# EAGLE board shield (EAGLE 6.5.0)
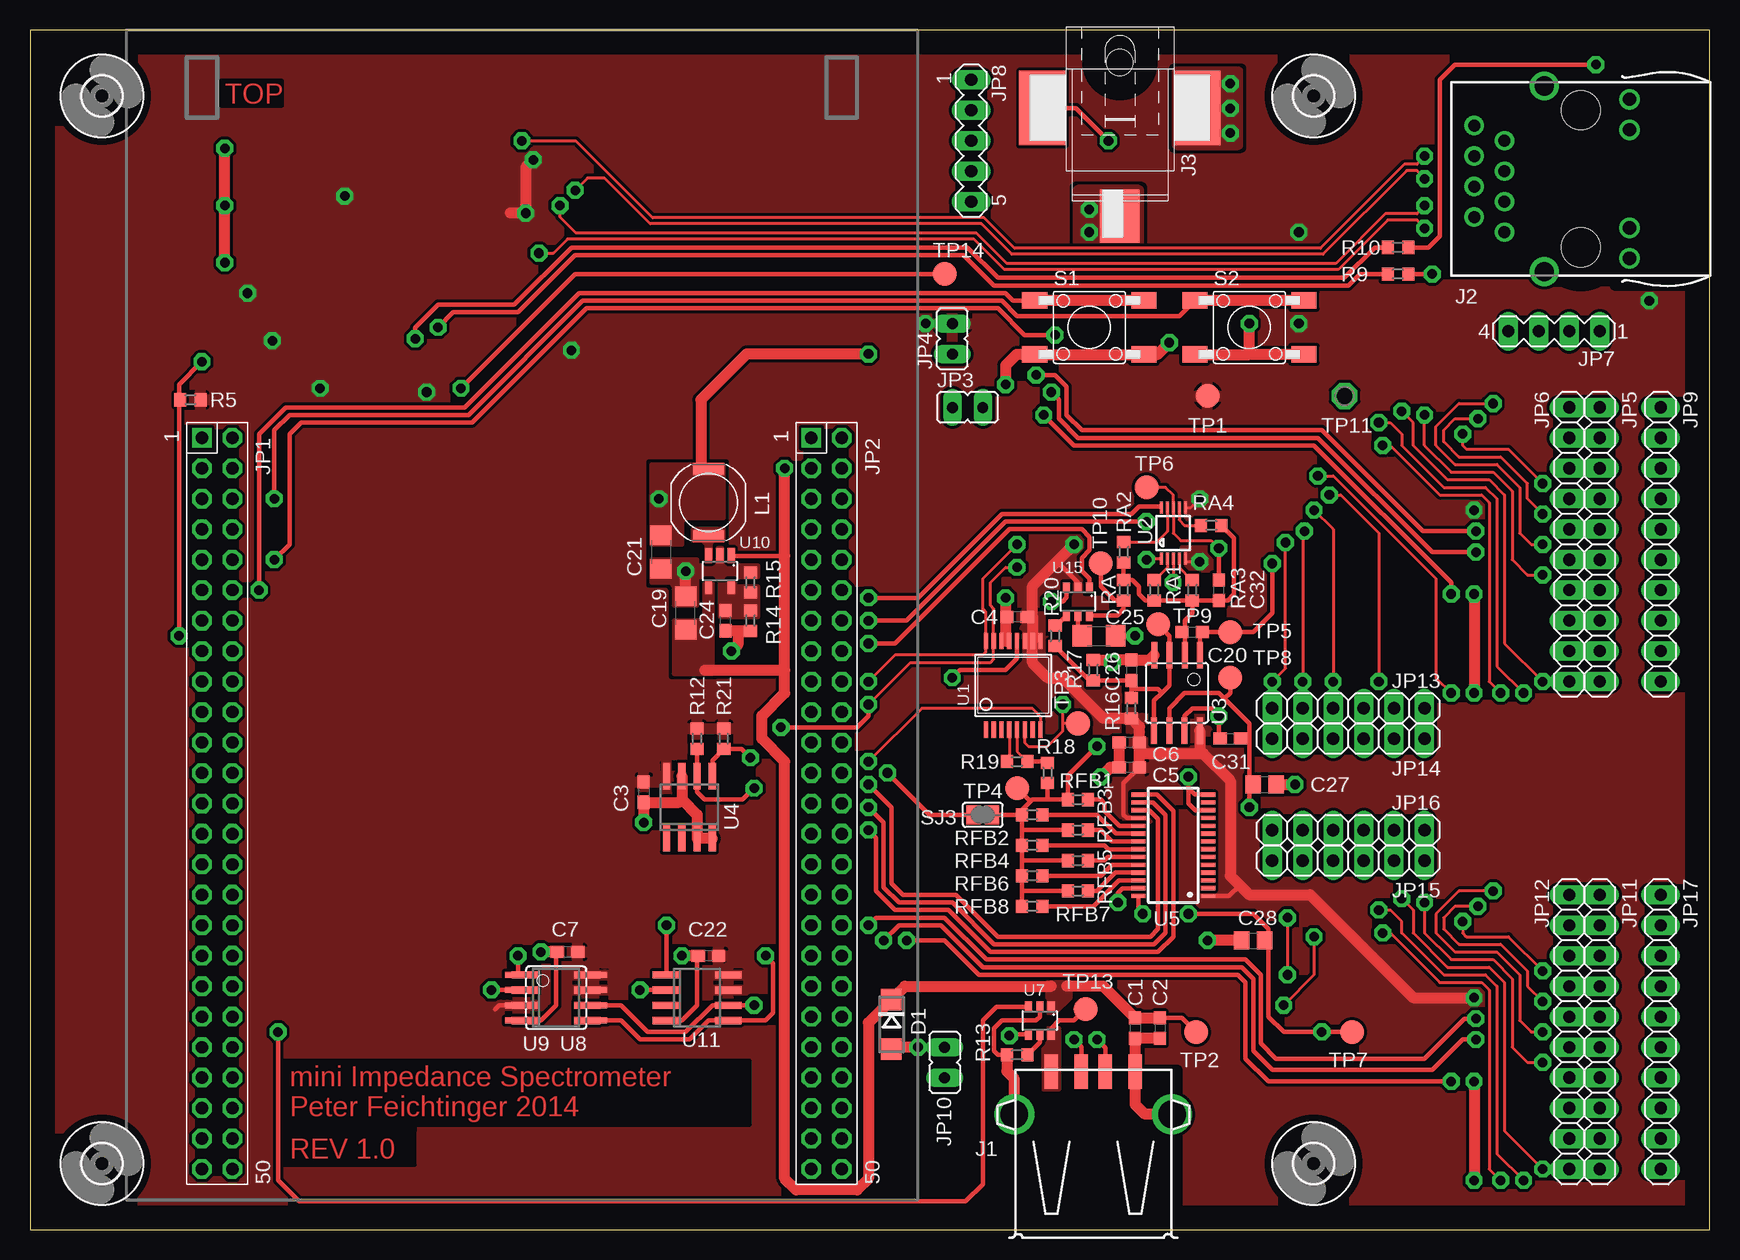
[diagram p0: board, top side]
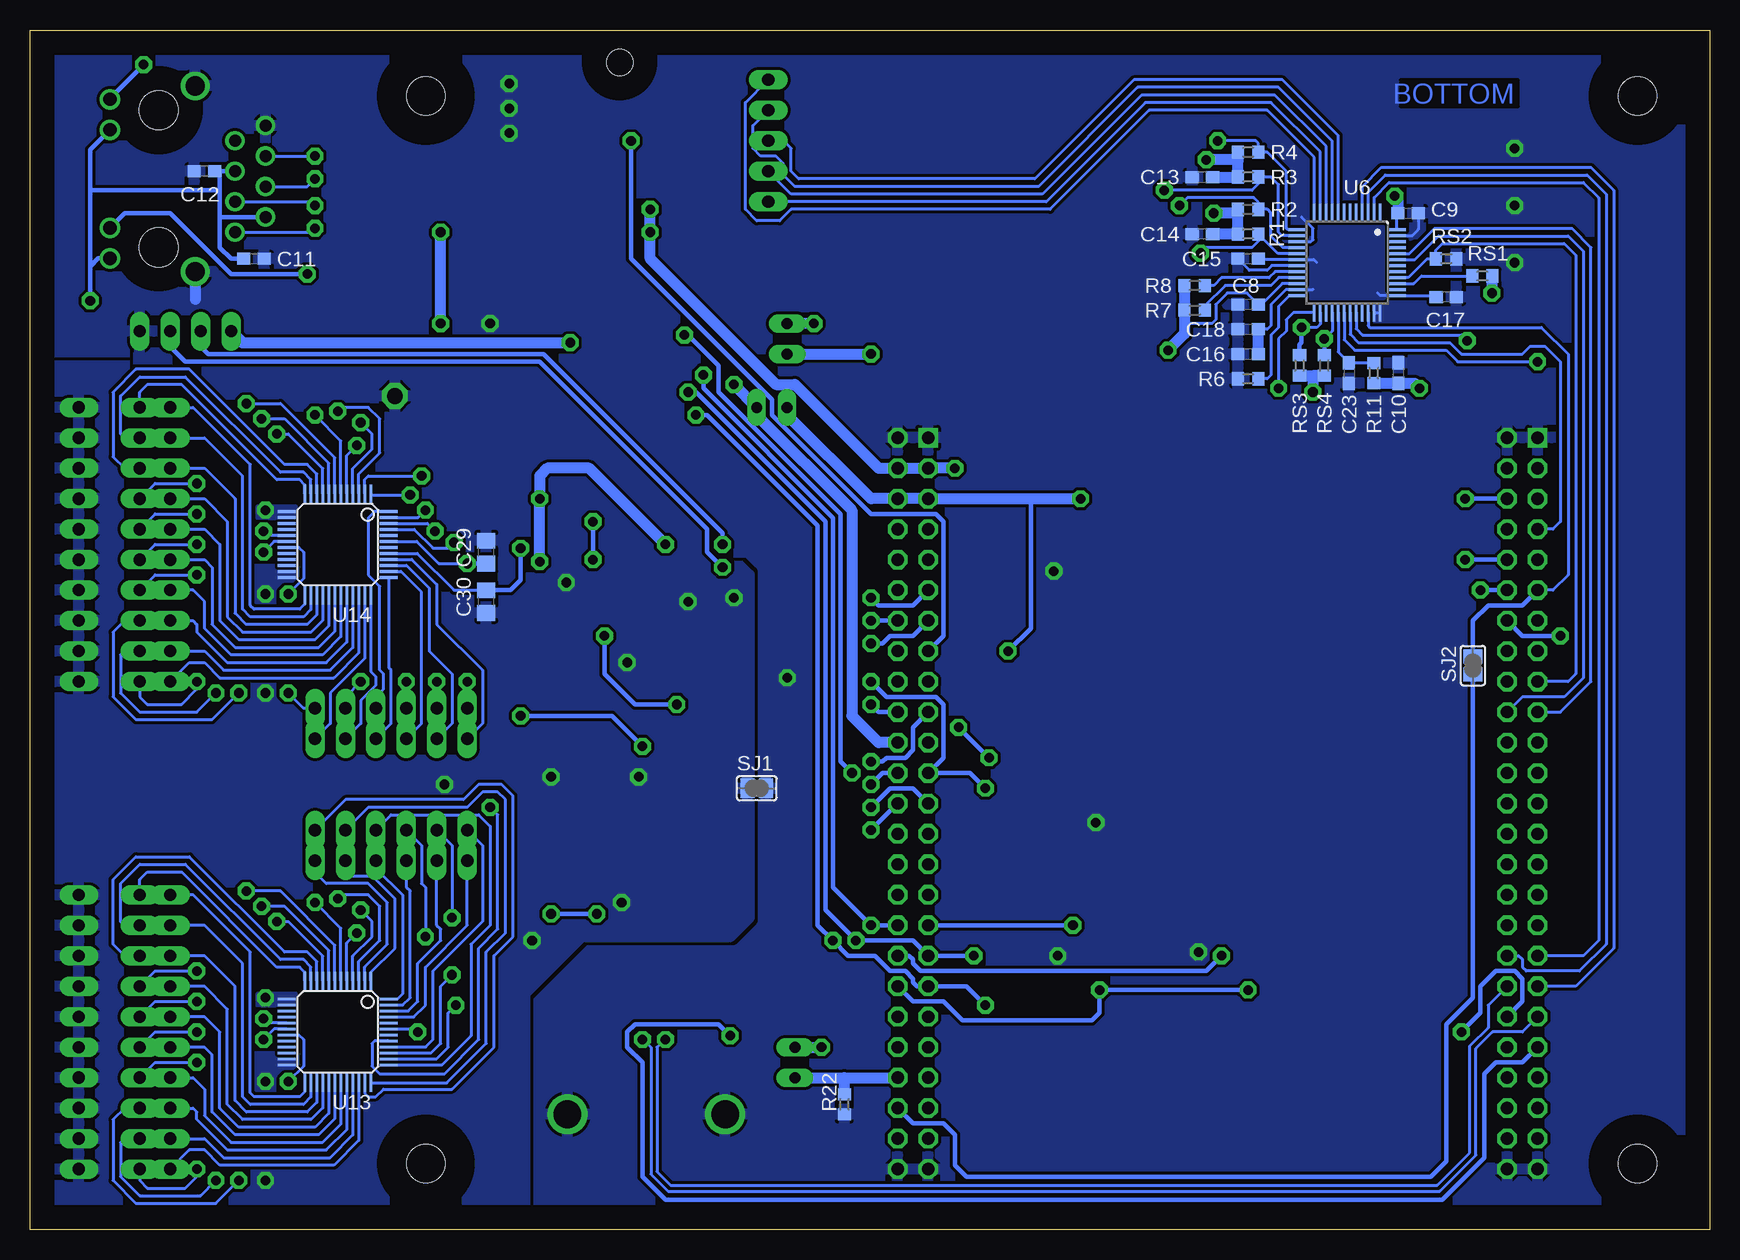
[diagram p1: board, bottom side, seen from below]

Size 140 x 100 mm. Coordinates in mm from the lower left corner, seen from the top.
Outline: 0,0 140,0 140,100 0,100 0,0
Copper layers (1*16): Top 0.035mm / dielectric 1.5mm / Bottom 0.035mm
Design rules "ime": minimum track width 10mil, minimum drill 0.8mm, track to track 10mil, track to pad 10mil, pad to pad 10mil, via to via 10mil, smd to smd 4mil, copper to edge 80mil, drill to drill 8mil, minimum pad ring 12mil, minimum via ring 12mil, stop-mask expansion 4mil, vias tented up to drill 0mil, thermal gap 10mil
Net classes: 1 supply: width 0.914 mm
tRestrict: area 118.5,78.7 to 139.7,96.5; area 81.6,-0.4 to 95.6,13.3; 12 lines
bRestrict: 4 lines

## Footprints (pad centres in the part's own frame; a part is rotated, then mirrored left to right if it is on the bottom)
C0603 = smd 1.1 x 1: 1 -0.85,0; 2 0.85,0
C3216 = smd 1.6 x 1.8: 1 -1.4,0; 2 1.4,0
C1206 = smd 1.6 x 1.8: 1 -1.4,0; 2 1.4,0
C0805 = smd 1.3 x 1.5: 1 -0.95,0; 2 0.95,0
DO214AC = smd 1.8 x 1.7: A 2.05,0; C -2.05,0
USB-2410-06 = smd 1.12 x 2.88: 1 -3.5,13.86; 2 -1,13.86; 3 1,13.86; 4 3.5,13.86 | drill 2.3: S1 -6.57,10.28; S2 6.57,10.28
SI-60062-F = drill 1: 1 -4.445,6.35; 2 -3.175,8.89; 3 -1.905,6.35; 4 -0.635,8.89; 5 0.635,6.35; 6 1.905,8.89; 7 3.175,6.35; 8 4.445,8.89 | drill 1.1: AG 4.089,-4.064; AY -6.629,-4.064; CG 6.629,-4.064; CY -4.089,-4.064 | drill 1.6 pad 2.2: S1 -7.747,3.048; S2 7.747,3.048 | hole 3.251: -5.715,0; 5.715,0
JACK-SMD2.5 = smd 4.4 x 3.3: 1 15.8,0 | smd 6.2 x 3.9: 2 6.8,6.45; 3 6.8,-6.45 | hole 2.2: 3,0
2X25-F = drill 1.016 square: 1 -30.48,-1.27 | drill 1.016 octagon: 2 -30.48,1.27; 3 -27.94,-1.27; 4 -27.94,1.27; 5 -25.4,-1.27; 6 -25.4,1.27; 7 -22.86,-1.27; 8 -22.86,1.27; 9 -20.32,-1.27; 10 -20.32,1.27; 11 -17.78,-1.27; 12 -17.78,1.27; 13 -15.24,-1.27; 14 -15.24,1.27; 15 -12.7,-1.27; 16 -12.7,1.27; 17 -10.16,-1.27; 18 -10.16,1.27; 19 -7.62,-1.27; 20 -7.62,1.27; 21 -5.08,-1.27; 22 -5.08,1.27; 23 -2.54,-1.27; 24 -2.54,1.27; 25 0,-1.27; 26 0,1.27; 27 2.54,-1.27; 28 2.54,1.27; 29 5.08,-1.27; 30 5.08,1.27; 31 7.62,-1.27; 32 7.62,1.27; 33 10.16,-1.27; 34 10.16,1.27; 35 12.7,-1.27; 36 12.7,1.27; 37 15.24,-1.27; 38 15.24,1.27; 39 17.78,-1.27; 40 17.78,1.27; 41 20.32,-1.27; 42 20.32,1.27; 43 22.86,-1.27; 44 22.86,1.27; 45 25.4,-1.27; 46 25.4,1.27; 47 27.94,-1.27; 48 27.94,1.27; 49 30.48,-1.27; 50 30.48,1.27
JP1 = drill 0.914 long: 1 0,-1.27; 2 0,1.27
1X10 = drill 1.016 long: 1 -11.43,0; 2 -8.89,0; 3 -6.35,0; 4 -3.81,0; 5 -1.27,0; 6 1.27,0; 7 3.81,0; 8 6.35,0; 9 8.89,0; 10 11.43,0
MA04-1 = drill 1.016 long: 1 -3.81,0; 2 -1.27,0; 3 1.27,0; 4 3.81,0
MA05-1 = drill 1.016 long: 1 -5.08,0; 2 -2.54,0; 3 0,0; 4 2.54,0; 5 5.08,0
1X06 = drill 1.016 long: 1 -6.35,0; 2 -3.81,0; 3 -1.27,0; 4 1.27,0; 5 3.81,0; 6 6.35,0
D63CB = smd 1 x 2.6: 1 -2.8,0; 2 2.8,0
R0603 = smd 1 x 1.1: 1 -0.85,0; 2 0.85,0
FSM = smd 1.4 x 2.1: 1 2.25,4.55; 2 2.25,-4.55; 3 -2.25,-4.55; 4 -2.25,4.55
SJ = smd 1.168 x 1.6: 1 -0.762,0; 2 0.762,0
TP20R = smd 2 x 2: TP 0,0
P1-13 = drill 1.321 pad 2.159 octagon: TP 0,0
SSOP16 = smd 0.35 x 1.35: 1 -2.275,-3.7; 2 -1.625,-3.7; 3 -0.975,-3.7; 4 -0.325,-3.7; 5 0.325,-3.7; 6 0.975,-3.7; 7 1.625,-3.7; 8 2.275,-3.7; 9 2.275,3.7; 10 1.625,3.7; 11 0.975,3.7; 12 0.325,3.7; 13 -0.325,3.7; 14 -0.975,3.7; 15 -1.625,3.7; 16 -2.275,3.7
MSOP10 = smd 0.25 x 1: 1 -1,-2.113; 2 -0.5,-2.113; 3 0,-2.113; 4 0.5,-2.113; 5 1,-2.113; 6 1,2.113; 7 0.5,2.113; 8 0,2.113; 9 -0.5,2.113; 10 -1,2.113
SOIC8 = smd 0.5 x 2.2: 1 -1.905,-3.154; 2 -0.645,-3.154; 3 0.625,-3.154; 4 1.895,-3.154; 5 1.905,3.154; 6 0.635,3.154; 7 -0.635,3.154; 8 -1.905,3.154
SO8 = smd 0.6 x 2.2: 1 -1.905,-2.6; 2 -0.635,-2.6; 3 0.635,-2.6; 4 1.905,-2.6; 5 1.905,2.6; 6 0.635,2.6; 7 -0.635,2.6; 8 -1.905,2.6
TSSOP28 = smd 0.35 x 1.2: 1 -4.225,-2.9; 2 -3.575,-2.9; 3 -2.925,-2.9; 4 -2.275,-2.9; 5 -1.625,-2.9; 6 -0.975,-2.9; 7 -0.325,-2.9; 8 0.325,-2.9; 9 0.975,-2.9; 10 1.625,-2.9; 11 2.275,-2.9; 12 2.925,-2.9; 13 3.575,-2.9; 14 4.225,-2.9; 15 4.225,2.9; 16 3.575,2.9; 17 2.925,2.9; 18 2.275,2.9; 19 1.625,2.9; 20 0.975,2.9; 21 0.325,2.9; 22 -0.325,2.9; 23 -0.975,2.9; 24 -1.625,2.9; 25 -2.275,2.9; 26 -2.925,2.9; 27 -3.575,2.9; 28 -4.225,2.9
LQFP48 = smd 1.5 x 0.22: 1 -4.15,2.75; 2 -4.15,2.25; 3 -4.15,1.75; 4 -4.15,1.25; 5 -4.15,0.75; 6 -4.15,0.25; 7 -4.15,-0.25; 8 -4.15,-0.75; 9 -4.15,-1.25; 10 -4.15,-1.75; 11 -4.15,-2.25; 12 -4.15,-2.75; 25 4.15,-2.75; 26 4.15,-2.25; 27 4.15,-1.75; 28 4.15,-1.25; 29 4.15,-0.75; 30 4.15,-0.25; 31 4.15,0.25; 32 4.15,0.75; 33 4.15,1.25; 34 4.15,1.75; 35 4.15,2.25; 36 4.15,2.75 | smd 0.22 x 1.5: 13 -2.75,-4.15; 14 -2.25,-4.15; 15 -1.75,-4.15; 16 -1.25,-4.15; 17 -0.75,-4.15; 18 -0.25,-4.15; 19 0.25,-4.15; 20 0.75,-4.15; 21 1.25,-4.15; 22 1.75,-4.15; 23 2.25,-4.15; 24 2.75,-4.15; 37 2.75,4.15; 38 2.25,4.15; 39 1.75,4.15; 40 1.25,4.15; 41 0.75,4.15; 42 0.25,4.15; 43 -0.25,4.15; 44 -0.75,4.15; 45 -1.25,4.15; 46 -1.75,4.15; 47 -2.25,4.15; 48 -2.75,4.15
SOT23-6 = smd 0.6 x 0.9: 1 -0.95,-1.15; 2 0,-1.15; 3 0.95,-1.15; 4 0.95,1.15; 5 0,1.15; 6 -0.95,1.15
TSOT23-5 = smd 0.62 x 1.22: 1 -0.95,-1.3; 2 0,-1.3; 3 0.95,-1.3; 4 0.95,1.3; 5 -0.95,1.3
TQFP48 = smd 0.22 x 1.5: 1 -2.75,-4.25; 2 -2.25,-4.25; 3 -1.75,-4.25; 4 -1.25,-4.25; 5 -0.75,-4.25; 6 -0.25,-4.25; 7 0.25,-4.25; 8 0.75,-4.25; 9 1.25,-4.25; 10 1.75,-4.25; 11 2.25,-4.25; 12 2.75,-4.25; 25 2.75,4.25; 26 2.25,4.25; 27 1.75,4.25; 28 1.25,4.25; 29 0.75,4.25; 30 0.25,4.25; 31 -0.25,4.25; 32 -0.75,4.25; 33 -1.25,4.25; 34 -1.75,4.25; 35 -2.25,4.25; 36 -2.75,4.25 | smd 1.5 x 0.22: 13 4.25,-2.75; 14 4.25,-2.25; 15 4.25,-1.75; 16 4.25,-1.25; 17 4.25,-0.75; 18 4.25,-0.25; 19 4.25,0.25; 20 4.25,0.75; 21 4.25,1.25; 22 4.25,1.75; 23 4.25,2.25; 24 4.25,2.75; 37 -4.25,2.75; 38 -4.25,2.25; 39 -4.25,1.75; 40 -4.25,1.25; 41 -4.25,0.75; 42 -4.25,0.25; 43 -4.25,-0.25; 44 -4.25,-0.75; 45 -4.25,-1.25; 46 -4.25,-1.75; 47 -4.25,-2.25; 48 -4.25,-2.75
3,2 = hole 3.2: 0,0

## Placement (x,y rotation side)
C1  100n  [C0603]  92.12,16.79 270 top
C2  10u  [C0603]  94.18,16.79 270 top
C3  100n  [C0603]  51.16,36.47 270 top
C4  100n  [C0603]  82.28,51.08 180 top
C5  100n  [C0603]  91.64,38.54 180 top
C6  10u  [C0603]  91.64,40.6 180 top
C7  100n  [C0603]  44.81,23.14 180 top
C8  100n  [C0603]  38.46,77.11 180 bottom
C9  100n  [C0603]  25.12,84.73 0 bottom
C10  100n  [C0603]  25.92,71.4 90 bottom
C11  100n  [C0603]  121.33,80.92 0 bottom
C12  100n  [C0603]  125.45,88.22 180 bottom
C13  100n  [C0603]  42.27,87.75 0 bottom
C14  100n  [C0603]  42.27,82.99 180 bottom
C15  10u  [C0603]  38.46,80.92 0 bottom
C16  100n  [C0603]  38.46,72.98 0 bottom
C17  100n  [C0603]  21.95,77.75 180 bottom
C18  100n  [C0603]  38.46,75.05 0 bottom
C19  10u  [C3216]  54.65,51.4 90 top
C20  N/A  [C0603]  96.88,49.81 0 top
C21  10u LowESR  [C3216]  52.59,56.48 270 top
C22  100n  [C0603]  56.56,22.82 180 top
C23  100n  [C0603]  30.05,71.4 270 bottom
C24  22p  [C0603]  57.99,50.76 90 top
C25  100u  [C1206]  89.1,49.49 0 top
C26  1n  [C0603]  91.8,46.63 270 top
C27  N/A  [C0805]  102.91,37.11 0 top
C28  N/A  [C0805]  101.96,24.09 0 top
C29  N/A  [C0805]  101.96,56.48 90 bottom
C30  N/A  [C0805]  101.96,52.35 90 bottom
C31  N/A  [C0603]  100.06,40.92 0 top
C32  N/A  [C0603]  99.1,53.3 90 top
D1  STPS1L30A  [DO214AC]  71.8,17.11 270 top
J1  USB-2410-06  [USB-2410-06]  88.62,-0.67 0 top
J2  SI-60062-F  [SI-60062-F]  129.26,87.59 90 top
J3  5V  [JACK-SMD2.5]  90.85,100.29 270 top
JP1  P1  [2X25-F]  15.6,35.52 270 top
JP2  P2  [2X25-F]  66.4,35.52 270 top
JP3  Idd  [JP1]  78.15,68.54 270 top
JP4  Icc  [JP1]  76.88,74.25 180 top
JP5  FORCE_OUT  [1X10]  130.85,57.11 270 top
JP6  SENSE_OUT  [1X10]  128.31,57.11 270 top
JP7  I2C  [MA04-1]  127.04,74.89 180 top
JP8  JTAG  [MA05-1]  78.47,90.77 270 top
JP9  GND  [1X10]  135.93,57.11 270 top
JP10  VBUS  [JP1]  76.24,13.93 0 top
JP11  FORCE_IN  [1X10]  130.85,16.47 270 top
JP12  SENSE_IN  [1X10]  128.31,16.47 270 top
JP13  CAL_FORCE_OUT  [1X06]  109.9,43.46 180 top
JP14  CAL_SENSE_OUT  [1X06]  109.9,40.92 180 top
JP15  CAL_FORCE_IN  [1X06]  109.9,30.76 180 top
JP16  CAL_SENSE_IN  [1X06]  109.9,33.3 180 top
JP17  GND  [1X10]  135.93,16.47 270 top
L1  A916CY-8R2M  [D63CB]  56.56,60.6 90 top
R1  51R  [R0603]  38.46,82.99 180 bottom
R2  51R  [R0603]  38.46,85.05 180 bottom
R3  51R  [R0603]  38.46,87.75 180 bottom
R4  51R  [R0603]  38.46,89.81 180 bottom
R5  1k5  [R0603]  13.38,69.17 0 top
R6  4k87 1%  [R0603]  38.46,70.92 0 bottom
R7  2k2  [R0603]  42.91,76.64 180 bottom
R8  2k2  [R0603]  42.91,78.7 180 bottom
R9  150R  [R0603]  114.03,79.65 0 top
R10  150R  [R0603]  114.03,81.88 0 top
R11  2k2  [R0603]  27.98,71.4 270 bottom
R12  3k9  [R0603]  55.61,40.92 90 top
R13  510R  [R0603]  82.28,14.56 0 top
R14  680k 1%  [R0603]  60.05,50.76 270 top
R15  150k 1%  [R0603]  60.05,53.94 270 top
R16  2k2  [R0603]  91.8,43.46 270 top
R17  2k2  [R0603]  88.62,46.63 270 top
R18  10k  [R0603]  84.81,38.06 270 top
R19  10k  [R0603]  82.28,39.01 0 top
R20  10  [R0603]  85.45,49.49 270 top
R21  3k9  [R0603]  57.83,40.92 90 top
R22  10k  [R0603]  72.11,10.44 90 bottom
RA  10k  [R0603]  91.16,53.3 270 top
RA1  10k  [R0603]  93.7,53.3 90 top
RA2  100  [R0603]  91.16,56.48 90 top
RA3  N/A  [R0603]  96.88,53.3 90 top
RA4  N/A  [R0603]  98.47,58.7 180 top
RFB1  100R  [R0603]  87.35,35.84 180 top
RFB2  1k  [R0603]  83.55,34.57 180 top
RFB3  10k  [R0603]  87.35,33.3 180 top
RFB4  100k  [R0603]  83.55,32.03 180 top
RFB5  1M  [R0603]  87.35,30.76 180 top
RFB6  N/A  [R0603]  83.55,29.49 180 top
RFB7  N/A  [R0603]  87.35,28.22 180 top
RFB8  N/A  [R0603]  83.55,26.95 180 top
RS1  2k2  [R0603]  18.93,79.49 180 bottom
RS2  2k2  [R0603]  21.95,80.92 0 bottom
RS3  2k2  [R0603]  34.17,72.03 90 bottom
RS4  2k2  [R0603]  32.11,72.03 90 bottom
S1  FSM4JSMATR  [FSM]  88.31,75.21 90 top
S2  FSM4JSMATR  [FSM]  101.64,75.21 90 top
SJ1  GND  [SJ]  79.42,36.79 0 bottom
SJ2  ETH_CLK  [SJ]  19.73,47.01 270 bottom
SJ3  OVFL  [SJ]  79.42,34.57 0 top
TP1  TPTP20R  [TP20R]  98.15,69.49 0 top
TP2  TPTP20R  [TP20R]  97.2,16.47 180 top
TP3  TPTP20R  [TP20R]  87.35,42.19 0 top
TP4  TPTP20R  [TP20R]  82.28,36.79 0 top
TP5  TPTP20R  [TP20R]  100.06,49.81 0 top
TP6  TPTP20R  [TP20R]  93.07,61.87 0 top
TP7  TPTP20R  [TP20R]  110.22,16.47 180 top
TP8  TPTP20R  [TP20R]  100.06,46 0 top
TP9  TPTP20R  [TP20R]  94.02,50.44 0 top
TP10  TPTP20R  [TP20R]  89.26,55.52 0 top
TP11  TPPAD1-13  [P1-13]  109.58,69.49 0 top
TP13  TPTP20R  [TP20R]  87.99,18.38 0 top
TP14  TPTP20R  [TP20R]  76.24,79.65 0 top
U1  AD5933YRS  [SSOP16]  81.96,45.36 0 top
U2  ADG704BRM  [MSOP10]  95.29,58.06 0 top
U3  AD8656ARZ  [SOIC8]  95.61,44.73 180 top
U4  M24C08WMN  [SO8]  54.97,35.2 0 top
U5  ADG706BRU  [TSSOP28]  95.29,32.03 90 top
U6  DP83848I  [LQFP48]  30.2,80.61 270 bottom
U7  MIC2009A-1YM6  [SOT23-6]  84.18,17.42 180 top
U8  AT25DF081A-SS  [SO8]  43.86,19.33 270 top
U9  SST25VF080B-80-4I-S2  [SOIC8]  43.86,19.33 270 top
U10  LTC3406AB  [TSOT23-5]  57.51,54.89 180 top
U11  23LCV1024-I/SN  [SO8]  55.61,19.33 270 top
U13  ADG725BSU  [TQFP48]  114.34,16.47 180 bottom
U14  ADG725BSU  [TQFP48]  114.34,57.11 180 bottom
U15  ADG819BRT  [SOT23-6]  87.35,52.35 180 top
U$1  [3,2]  6,94.5 0 top
U$2  [3,2]  6,5.5 0 top
U$3  [3,2]  107,94.5 0 top
U$4  [3,2]  107,5.5 0 top

## Library data of the parts
C1-C32 R1-R22 RA RA1-RA4 RFB1-RFB8 RS1-RS4 = rcl
D1 = parts; RS: 485-8061
J1 = parts; RS: 737-8791
J2 = parts; RS: 741-8489
J3 = parts; RS: 476-157
JP1 JP2 = parts; RS: 766-6660
JP3 JP4 JP10 SJ1-SJ3 = jumper
JP5 JP6 JP9 JP11-JP17 = pinhead
JP7 JP8 = con-lstb; OC_FARNELL: unknown; OC_NEWARK: unknown
L1 = parts; INDUCTANCE: 8.2u; RS: 752-1361
S1 S2 = parts; RS: 718-2455
TP1 = testpad; TP_SIGNAL_NAME: VCC
TP2 = testpad; TP_SIGNAL_NAME: 5V
TP3 = testpad; TP_SIGNAL_NAME: VOUT
TP4 = testpad; TP_SIGNAL_NAME: VIN
TP5 = testpad; TP_SIGNAL_NAME: FORCE_OUT
TP6 = testpad; TP_SIGNAL_NAME: SENSE_OUT
TP7 = testpad; TP_SIGNAL_NAME: FORCE_IN
TP8 = testpad; TP_SIGNAL_NAME: SENSE_IN
TP9 = testpad; TP_SIGNAL_NAME: VCC/2
TP10 = testpad; TP_SIGNAL_NAME: Vcoupl
TP11 = testpad; TP_SIGNAL_NAME: AGND
TP13 = testpad; TP_SIGNAL_NAME: USBH_VBUS
TP14 = testpad; TP_SIGNAL_NAME: MAC_CLK
U1 = parts; RS: 709-4816
U2 = parts; RS: 523-8761
U3 = parts; RS: 759-1370
U4 = parts; RS: 415-1180; VCC: 2.5V - 5.5V
U5 = parts; RS: 523-6478
U6 = parts; MPN: DP83848IVV; RS: 651-5766
U7 = parts; RS: 727-4832
U8 = parts; RS: 738-0094
U9 = parts; RS: 736-9258
U10 = parts; RS: 761-9409
U11 = parts; RS: 792-8738
U13 U14 = parts; RS: 538-6747
U15 = parts; RS: 796-8956
U$1-U$4 = holes

## Nets
!RST: JP1.6 S2.1 S2.2
+3V3 [supply]: C21.1 C24.1 JP2.5 JP2.6 JP3.1 JP4.2 L1.2 R14.2
+5V [supply]: C1.1 C2.1 C19.1 D1.C J3.1 JP2.3 JP2.4 TP2.TP U7.1 U10.1 U10.4
AGND [supply]: C4.2 C5.2 C6.2 C26.1 C27.2 C28.1 C29.2 C30.1 JP9.1 JP9.2 JP9.3 JP9.4 JP9.5 JP9.6 JP9.7 JP9.8 JP9.9 JP9.10 JP17.1 JP17.2 JP17.3 JP17.4 JP17.5 JP17.6 JP17.7 JP17.8 JP17.9 JP17.10 R17.1 SJ1.1 TP11.TP U1.13 U1.14 U2.3 U3.4 U5.12 U5.14 U5.27 U13.23 U13.24 U14.23 U14.24 U15.3
ETH_CLK: JP1.11 SJ2.1 U6.34
GND [supply]: C1.2 C2.2 C3.2 C7.2 C8.2 C9.2 C10.2 C11.2 C12.2 C13.1 C14.2 C15.1 C16.1 C17.1 C18.1 C19.2 C21.2 C22.2 C23.2 J1.4 J1.S1 J1.S2 J2.8 J2.S1 J2.S2 J3.2 JP1.1 JP1.2 JP1.49 JP1.50 JP2.1 JP2.2 JP2.49 JP2.50 JP7.1 R6.1 R13.1 R15.1 R22.1 RS2.2 S2.3 S2.4 SJ1.2 U1.12 U4.3 U4.4 U4.7 U6.15 U6.19 U6.35 U6.36 U6.47 U7.2 U8.4 U9.4 U10.2 U11.4
N$1 [analog]: C31.1 R18.2 RFB1.2 RFB2.2 RFB3.2 RFB4.2 RFB5.2 RFB6.2 RFB7.2 RFB8.2 SJ3.2 TP4.TP U3.7
N$2: RA.2 TP10.TP U15.6
N$3 [analog]: C20.1 C32.1 RA1.1 RA2.1 RA3.1 RA4.1 RA.1 U3.2
N$4 [analog]: RA3.2 U2.4
N$5 [analog]: RA4.2 U2.7
N$6 [analog]: RFB1.1 U5.19
N$7 [analog]: RFB2.1 U5.20
N$8 [analog]: RFB3.1 U5.21
N$9 [analog]: RFB4.1 U5.22
N$10 [analog]: RFB5.1 U5.23
N$11 [analog]: RFB6.1 U5.24
N$12 [analog]: C27.1 C31.2 TP8.TP U3.6 U13.41
N$13 [analog]: C28.2 TP7.TP U5.28 U13.43
N$14 [analog]: C20.2 C29.1 TP5.TP U3.1 U14.43
N$15 [analog]: C30.2 C32.2 TP6.TP U2.8 U14.41
N$16 [analog]: JP12.1 U13.25
N$17 [analog]: JP12.2 U13.26
N$18 [analog]: JP12.3 U13.27
N$19 [analog]: JP12.4 U13.28
N$20: J2.CY R9.2
N$21: RS1.2 U6.39
N$22: R9.1 RS3.2 U6.26
N$23: R10.1 RS4.2 U6.28
N$24: C15.2 C16.2 C17.2 C18.2 U6.18 U6.23 U6.37
N$25: J2.CG R10.2
N$26 [supply]: J1.1 TP13.TP U7.6
N$27: JP8.1 U6.12
N$28: JP8.2 U6.9
N$29: JP8.3 U6.8
N$30: JP8.4 U6.10
N$31: JP8.5 U6.11
N$32: C23.1 R11.1 U6.29
N$33: R6.2 U6.24
N$34: R8.1 U6.20
N$35: R7.1 U6.21
N$37: D1.A JP10.2
N$39: R13.2 U7.5
N$40 [supply]: C24.2 R14.1 R15.2 U10.5
N$41 [supply]: L1.1 U10.3
N$42 [analog]: JP12.5 U13.29
N$43 [analog]: JP12.6 U13.30
N$44 [analog]: JP12.7 U13.31
N$45 [analog]: JP12.8 U13.32
N$46 [analog]: JP12.9 U13.33
N$47 [analog]: JP12.10 U13.34
N$48 [analog]: JP11.1 U13.12
N$49 [analog]: JP11.2 U13.11
N$50 [analog]: JP11.3 U13.10
N$51 [analog]: JP11.4 U13.9
N$52 [analog]: JP11.5 U13.8
N$53 [analog]: JP11.6 U13.7
N$54 [analog]: JP11.7 U13.6
N$55 [analog]: JP11.8 U13.5
N$56 [analog]: JP11.9 U13.4
N$57 [analog]: JP11.10 U13.3
N$58 [analog]: JP5.1 U14.12
N$59 [analog]: JP5.2 U14.11
N$60 [analog]: JP5.3 U14.10
N$61 [analog]: JP5.4 U14.9
N$62 [analog]: JP5.5 U14.8
N$63 [analog]: JP5.6 U14.7
N$64 [analog]: JP5.7 U14.6
N$65 [analog]: JP5.8 U14.5
N$66 [analog]: JP5.9 U14.4
N$67 [analog]: JP5.10 U14.3
N$68 [analog]: JP6.1 U14.25
N$69 [analog]: JP6.2 U14.26
N$70 [analog]: JP6.3 U14.27
N$71 [analog]: JP6.4 U14.28
N$72 [analog]: JP6.5 U14.29
N$73 [analog]: JP6.6 U14.30
N$74 [analog]: JP6.7 U14.31
N$75 [analog]: JP6.8 U14.32
N$76 [analog]: JP6.9 U14.33
N$77 [analog]: JP6.10 U14.34
N$78 [analog]: JP13.1 U14.2
N$79 [analog]: JP13.2 U14.1
N$80 [analog]: JP13.3 U14.48
N$81 [analog]: JP13.4 U14.47
N$82 [analog]: JP13.5 U14.46
N$83 [analog]: JP13.6 U14.45
N$84 [analog]: JP14.1 U14.35
N$85 [analog]: JP14.2 U14.36
N$86 [analog]: JP14.3 U14.37
N$87 [analog]: JP14.4 U14.38
N$88 [analog]: JP14.5 U14.39
N$89 [analog]: JP14.6 U14.40
N$90 [analog]: JP15.1 U13.2
N$91 [analog]: JP15.2 U13.1
N$92 [analog]: JP15.3 U13.48
N$93 [analog]: JP15.4 U13.47
N$94 [analog]: JP15.5 U13.46
N$95 [analog]: JP15.6 U13.45
N$96 [analog]: JP16.1 U13.35
N$97 [analog]: JP16.2 U13.36
N$98 [analog]: JP16.3 U13.37
N$99 [analog]: JP16.4 U13.38
N$100 [analog]: JP16.5 U13.39
N$101 [analog]: JP16.6 U13.40
N$102 [analog]: RA2.2 U2.9
N$103 [analog]: RA1.2 U2.2
N$104 [analog]: RFB7.1 U5.25
N$105 [analog]: RFB8.1 U5.26
N$106: TP14.TP U6.25
N$107: C25.1 U15.5
N$108 [analog]: R20.1 U15.4
PA0: JP1.12 S1.1 S1.2
PA2: JP1.14 R5.1 U6.30
PA7: JP1.17 RS2.1 U6.40
PA9: JP2.44 JP10.1 R22.2
PB4: JP2.25 U5.16
PB5: JP2.26 U5.15
PB6: JP2.23 JP7.3 R12.1 U1.16 U4.6
PB7: JP2.24 U5.17
PB8: JP2.19 U1.8
PB9: JP2.20 JP7.2 R21.1 U1.15 U4.5
PB11: JP1.35 U6.2
PB12: JP1.36 U6.3
PB13: JP1.37 U6.4
PC1: JP1.7 U6.31
PC2 [analog]: JP1.10 SJ3.1
PC4: JP1.20 U6.43
PC5: JP1.19 U6.44
PC9: JP2.46 SJ2.2
PC10: JP2.37 U8.6 U9.6 U11.6 U13.19 U14.19
PC11: JP2.38 U8.2 U9.2 U11.2
PC12: JP2.35 U8.5 U9.5 U11.5 U13.18 U14.18
PD0: JP2.36 U8.1 U9.1
PD1: JP2.33 U11.1
PD2: JP2.34 U13.17 U14.17
PD8: JP1.40 U7.3
PD9: JP1.41 U7.4
PE2: J3.3 JP2.15
PE4: JP2.13 U15.1
PE5: JP2.14 U2.1
PE6: JP2.11 U2.10
RD_N: J2.6 R4.1 U6.13
RD_P: J2.4 R3.1 U6.14
RFB [analog]: R19.1 U1.4
TD_N: J2.3 R2.1 U6.16
TD_P: J2.1 R1.1 U6.17
USB_N: J1.2 JP1.38
USB_P: J1.3 JP1.39
VCC [supply]: C3.1 C4.1 C5.1 C6.1 C7.1 C8.1 C9.1 C10.1 C11.1 C12.1 C13.2 C14.1 C22.1 J2.2 J2.5 J2.AG J2.AY JP4.1 R1.2 R2.2 R3.2 R4.2 R5.2 R7.2 R8.2 R11.2 R12.2 R16.2 R21.2 RS1.1 RS3.1 RS4.1 TP1.TP U1.9 U1.10 U1.11 U2.5 U2.6 U3.8 U4.8 U5.1 U5.18 U6.22 U6.32 U6.48 U8.3 U8.7 U8.8 U9.3 U9.7 U9.8 U11.7 U11.8 U13.13 U13.14 U14.13 U14.14 U15.2
VCC/2 [analog]: C26.2 R16.1 R17.2 R20.2 TP9.TP U3.3 U3.5
VDD [supply]: JP2.22 JP3.2 JP7.4 S1.3 S1.4
VIN [analog]: R18.1 R19.2 U1.5
VOUT [analog]: C25.2 TP3.TP U1.6

## Tracks (layer width: path | path; a pad name or v marks a point on that pad's centre or on a via)
!RST  (via drill 0.8)
  Top 0.356: v20.36,60.92 20.36,66.64 21.63,67.91 36.55,67.91 46.08,77.43 81,77.43 82.28,76.16 95.8,76.16 S2.1
  Top 0.914: S2.2 S2.1
  Bottom 0.356: JP1.6 v20.36,60.92
+3V3  (via drill 0.8)
  Top 0.914: R14.2 59.01,49.91 | 59.01,49.91 C24.1 | 59.01,49.91 59.01,48.77 v58.46,48.22 | v69.89,72.98 59.73,72.98 55.92,69.17 55.92,63.46
  Bottom 0.356: v58.46,48.22 56.56,50.12 56.56,60.92
  Bottom 0.914: JP3.1 76.88,67.91 69.89,60.92 JP2.6 JP2.5 56.56,60.92 v52.43,60.92 | JP4.2 v69.89,72.98
  pour Top (rank 2, no thermals): 51.8,57.11 54.34,57.11 54.34,59.02 54.65,59.33 57.83,59.33 57.83,63.78 51.8,63.78
+5V  (via drill 0.8)
  Top 0.356: U10.1 58.49,56.16 62.91,56.16 | C2.1 96.03,17.64 TP2.TP
  Top 0.914: C2.1 C1.1 89.47,20.28 86.4,20.28 | 62.91,46.63 62.91,44.73 61,42.82 61,40.92 62.91,39.01 62.91,4.25 63.86,3.29 68.94,3.29 69.89,4.25 69.89,17.25 D1.C 72.92,20.28 85.13,20.28 | 62.91,46.63 62.91,56.16 v62.91,63.46 | 56.24,46.63 62.91,46.63
  Bottom 0.914: v88.31,85.05 v88.31,83.14 88.31,80.92 77.83,70.44 76.24,70.44 69.26,63.46 JP2.4 JP2.3 v62.91,63.46
  pour Top (rank 2, no thermals): 53.7,50.76 55.92,50.76 56.24,51.08 56.24,54.25 56.88,54.25 56.88,46.31 53.7,46.31
  pour Top (rank 2, no thermals): 84.81,18.06 84.81,20.6 86.72,20.6 86.72,19.33 85.45,18.06
  pour Top (no thermals): 87.35,82.19 92.44,82.19 92.44,86.64 87.35,86.64
AGND  (via drill 0.8)
  Top 0.254: U2.3 v95.29,53.94 | U1.13 81.32,49.06 U1.14
  Top 0.356: U5.12 97.13,34.95 96.56,35.52 96.56,36.79 | 96.56,36.79 v96.56,37.74 | U5.14 97.1,36.25 96.56,36.79 | U5.27 91.08,28.45 90.69,28.06 v90.69,27.27 | U15.3 86.41,52.67 86.09,52.35 v85.13,52.35
  Top 0.914: v120.38,52.98 v120.38,44.73 | v120.38,12.34 v120.38,4.09 | U3.4 93.32,47.48 C26.1 90.21,47.48 | v81.32,52.66 81.32,51.18 C4.2 81.32,51.08 81.32,49.06 | C27.2 v105.45,37.11 | C6.2 C5.2 90.05,38.54 v89.26,37.74 | C28.1 v98.15,24.09 | R17.1 90.21,47.48 | 90.21,47.48 v90.21,47.27
  pour Bottom (no thermals): 117.83,54.89 120.38,54.89 121.01,54.25 121.01,52.66 120.69,52.35 120.06,52.35 119.74,52.66 119.74,53.94 119.42,54.25 117.83,54.25
  pour Bottom (no thermals): 117.83,14.25 120.38,14.25 121.01,13.61 121.01,12.03 120.69,11.71 120.06,11.71 119.74,12.03 119.74,13.29 119.42,13.61 117.83,13.61
  pour Bottom (rank 5): 140.06,-0.67 140.06,72.03 97.52,72.03 80.05,54.57 80.05,26 81.64,24.41 94.02,24.41 98.78,19.64 98.78,-0.67
ETH_CLK
  Bottom 0.254: U6.34 28.45,75.36 28.3,75.21 14.01,75.21 11.79,72.98 11.79,54.57 13.06,53.3 JP1.11
  Bottom 0.356: JP1.11 15.6,52.03 18.46,52.03 19.73,50.76 SJ2.1
GND  (via drill 0.8)
  Top 0.356: R13.1 80.69,14.56 80.37,14.88 80.37,16.79 81,17.42 83.86,17.42 84.18,17.74 U7.2 | v76.88,46 77.51,46.63 81.32,46.63 82.28,47.59 U1.12 | U11.4 54.34,17.42 55.61,18.69 55.61,22.72 C22.2 | C7.2 43.86,23.04 43.86,18.69 42.59,17.42 U8.4 U9.4
  Top 0.914: C19.2 v54.65,54.89 | C2.2 C1.2 92.12,13.19 | 92.12,13.19 J1.4 | 92.12,13.19 92.12,10.44 92.95,9.61 J1.S2 | R13.1 81.42,13.19 82.06,12.56 J1.S1 | v16.23,80.61 v16.23,85.37 v16.23,90.13 | C22.2 v54.34,22.82 | C7.2 v42.59,23.14 | U4.4 U4.3 55.61,34.57 54.34,35.84 | U4.7 54.34,35.84 | 54.34,35.84 54.12,35.62 C3.2 v51.16,33.93 | S2.4 101.64,72.96 | 101.64,72.96 v101.64,75.53 | S2.3 101.64,72.96
  Bottom 0.254: U6.19 36.49,80.36 36.87,79.97 38.36,79.97 C15.1 | U6.35 U6.36 | U6.15 33.22,82.36 33.06,82.51 33.06,83.46 34.02,84.42 | U6.47 24.78,82.86 24.27,83.36 C9.2
  Bottom 0.914: J2.S1 126.22,77.56
  other vias: 100.06,95.53 100.06,93.46 100.06,91.4
  pour Top (no thermals): 55.61,55.84 51.8,55.84 51.8,53.94 53.38,53.94 53.7,53.62 53.7,52.03 55.61,52.03 55.61,54.41 60.69,54.41 60.69,55.36 57.67,55.36 57.67,56.79 57.35,56.79 57.35,55.36 55.61,55.36
  pour Bottom (rank 6): -0.1,-0.67 -0.1,100.29 140.06,100.29 140.06,-0.67
  pour Top (no thermals): 95.61,96.48 95.61,90.45 100.69,90.45 100.69,96.48
N$1  (via drill 0.8)
  Top 0.356: 82.69,28.22 RFB6.2 82.69,30.76 | 82.69,30.76 RFB4.2 82.69,33.3 | 82.69,33.3 RFB2.2 | RFB7.2 82.69,28.22 | RFB5.2 82.69,30.76 | RFB3.2 82.69,33.3 | 84.81,35.84 RFB1.2 86.5,37.84 v88.94,40.28 | 82.69,28.22 RFB8.2 | 84.81,35.84 83.55,35.84 83.39,35.68 | 83.39,35.68 82.69,34.99 RFB2.2 | TP4.TP 83.39,35.68 | U3.7 96.25,42.82 96.88,43.46 98.47,43.46 v99.1,42.82 99.1,41.02 C31.1 | R18.2 84.81,35.84 | RFB2.2 SJ3.2
  Bottom 0.356: v88.94,40.28 91.48,42.82 v99.1,42.82
N$2
  Top 0.356: U15.6 90.65,51.2 91.16,51.71 RA.2 90.43,52.45 89.26,53.62 TP10.TP
N$3
  Top 0.356: RA2.1 RA.1 91.9,54.15 92.44,53.62 92.44,52.98 92.97,52.45 RA1.1 RA3.1 | RA3.1 96.88,51.4 96.25,50.77 96.25,49.81 | U3.2 96.25,49.81 | C20.1 96.25,49.81 | RA3.1 C32.1 99.84,52.45 100.37,52.98 100.37,57.64 RA4.1
N$4
  Top 0.254: U2.4 95.79,55.18 96.82,54.15 RA3.2
N$5
  Top 0.254: U2.7 95.79,59.15 96.25,58.7 RA4.2
N$6
  Top 0.356: U5.19 90.81,33.65 89.58,34.88 89.58,35.52 89.26,35.84 RFB1.1
N$7
  Top 0.356: U5.20 90.51,33 88.94,34.57 RFB2.1
N$8
  Top 0.356: U5.21 90.2,32.35 89.26,33.3 RFB3.1
N$9
  Top 0.356: U5.22 89.9,31.7 89.58,32.03 RFB4.1
N$10
  Top 0.356: U5.23 89.87,31.05 89.58,30.76 RFB5.1
N$11
  Top 0.356: U5.24 90.17,30.4 89.26,29.49 RFB6.1
N$12  (via drill 0.8)
  Top 0.356: U3.6 94.97,43.46 96.25,44.73 99.1,44.73 99.58,44.25 | 99.58,44.25 101.64,42.19 101.64,40.92 | 101.64,40.92 101.64,37.11 | 101.64,37.11 v101.64,35.2 | TP8.TP 100.06,44.73 99.58,44.25 | C27.1 101.64,37.11 | C31.2 101.64,40.92
  Bottom 0.254: U13.41 111.28,15.72 111.48,15.52 111.48,13.61 110.85,12.98 105.45,12.98 102.59,15.84 102.59,23.45 101.01,25.04 101.01,34.57 v101.64,35.2
N$13  (via drill 0.8)
  Top 0.356: TP7.TP v107.67,16.47 104.5,16.47 103.23,17.74 103.23,24.09 | 103.23,24.09 103.23,25.04 101.96,26.31 v96.56,26.31 | v92.75,26.31 92.39,26.67 U5.28 | C28.2 103.23,24.09
  Bottom 0.254: U13.43 107.92,16.72 v107.67,16.47
  Bottom 0.356: v92.75,26.31 v96.56,26.31
N$14  (via drill 0.8)
  Top 0.356: U3.1 97.52,49.81 C20.2 TP5.TP 101.96,49.81 103.55,51.4 v103.55,55.52
  Bottom 0.254: U14.43 107.77,57.36 105.93,55.52 v103.55,55.52
  Bottom 0.356: C29.1 v103.55,55.52
N$15  (via drill 0.8)
  Top 0.254: v99.1,56.79 98.47,57.43 95.93,57.43 95.29,58.06 U2.8 95.29,61.24 94.66,61.87 TP6.TP
  Top 0.356: v99.1,56.79 C32.2
  Bottom 0.254: U14.41 107.72,56.36 104.66,53.3 C30.2
  Bottom 0.356: C30.2 99.95,53.3 C32.2 v99.1,56.79
N$16
  Bottom 0.254: U13.25 117.09,11.5 117.52,11.07 121.33,11.07 121.64,11.39 121.64,23.14 126.41,27.9 JP12.1
N$17
  Bottom 0.254: U13.26 116.59,11.04 117.2,10.44 121.64,10.44 122.28,11.07 122.28,22.18 125.45,25.36 JP12.2
N$18
  Bottom 0.254: U13.27 116.09,10.59 116.88,9.8 121.96,9.8 122.92,10.76 122.92,20.28 125.45,22.82 JP12.3
N$19
  Bottom 0.254: U13.28 115.59,10.14 116.56,9.17 122.28,9.17 123.55,10.44 123.55,18.38 125.45,20.28 JP12.4
N$20  (via drill 0.8)
  Top 0.356: R9.2 v116.88,79.65
  Bottom 0.356: J2.CY 133.33,83.53 132.12,84.73 128.31,84.73 123.23,79.65 v116.88,79.65
N$21
  Bottom 0.254: U6.39 24.65,78.86 24.01,79.49 RS1.2
N$22  (via drill 0.8)
  Top 0.356: v34.02,75.21 35.28,76.48 40.68,76.48 45.45,81.24 77.83,81.24 80.37,78.7 109.9,78.7 110.85,79.65 R9.1
  Bottom 0.254: U6.26 32.45,75.5 32.74,75.21 v34.02,75.21
  Bottom 0.356: RS3.2 34.17,73.78 34.02,73.94 v34.02,75.21
N$23  (via drill 0.8)
  Top 0.356: v32.11,74.25 32.11,75.21 34.02,77.11 40.37,77.11 45.13,81.88 78.15,81.88 80.69,79.33 109.58,79.33 112.12,81.88 R10.1
  Bottom 0.254: U6.28 31.45,74.91 v32.11,74.25
  Bottom 0.356: RS4.2 v32.11,74.25
N$24
  Bottom 0.254: C15.2 37.54,80.86 U6.18 32.99,80.86 32.74,80.61 | C18.2 36.87,75.05 36.55,75.37 36.55,77.11 35.31,78.36 U6.23 33.09,78.36 33.06,78.38 | 27.66,78.06 27.45,77.86 U6.37 22.91,77.86 C17.2
  Bottom 0.914: C16.2 C18.2
  pour Bottom (no thermals): 27.35,77.43 33.06,77.43 33.38,77.75 33.38,83.46 33.06,83.78 27.35,83.78 27.03,83.46 27.03,77.75
N$25  (via drill 0.8)
  Top 0.356: R10.2 116.56,81.88 117.52,82.83 117.52,95.84 118.79,97.11 v130.53,97.11
  Bottom 0.356: J2.CG 133.33,94.32 v130.53,97.11
N$26
  Top 0.356: U7.6 85.13,16.79 85.77,17.42 87.04,17.42 TP13.TP
  pour Top (rank 2, no thermals): 84.5,16.79 85.77,16.79 85.77,11.71 84.5,11.71
N$27
  Bottom 0.254: U6.12 32.95,89.39 36.87,93.31 46.72,93.31 54.97,85.05 76.56,85.05 77.51,84.1 79.42,84.1 80.37,85.05 80.37,93.94 JP8.1
N$28
  Bottom 0.254: U6.9 31.45,90.75 35.92,95.21 47.67,95.21 55.92,86.95 76.24,86.95 77.19,87.91 77.19,88.86 77.83,89.5 79.1,89.5 79.73,90.13 79.73,92.03 JP8.2
N$29
  Bottom 0.254: U6.8 30.95,91.2 35.6,95.84 47.98,95.84 56.24,87.59 75.92,87.59 76.56,88.22 76.56,90.13 77.19,90.77 JP8.3
N$30
  Bottom 0.254: U6.10 31.95,90.29 36.24,94.58 47.35,94.58 55.61,86.32 76.56,86.32 JP8.4
N$31
  Bottom 0.254: U6.11 32.45,89.84 36.55,93.94 47.03,93.94 55.29,85.69 JP8.5
N$32
  Bottom 0.254: R11.1 C23.1 30.95,73.16 U6.29
N$33
  Bottom 0.254: U6.24 35.02,77.86 35.92,76.95 35.92,75.21 36.55,74.57 36.55,71.24 36.87,70.92 R6.2
N$34
  Bottom 0.254: U6.20 36.19,79.86 36.71,79.33 40.68,79.33 41.32,78.7 R8.1
N$35
  Bottom 0.254: U6.21 35.9,79.36 36.55,78.7 40.37,78.7 42.05,77.01 R7.1
N$37  (via drill 0.8)
  Top 0.914: v74.02,15.2 71.94,15.2 D1.A
  Bottom 0.914: JP10.2 v74.02,15.2
N$39
  Top 0.356: U7.5 84.18,15.62 R13.2
N$40
  pour Top (rank 3, no thermals): 60.69,53.62 60.69,51.08 57.51,51.08 57.51,54.25 58.78,54.25 58.78,53.62
N$41
  pour Top (rank 2, no thermals): 56.4,55.52 56.4,57.11 56.08,57.43 55.29,57.43 55.29,58.38 57.83,58.38 57.83,57.43 57.03,57.43 56.72,57.11 56.72,55.52
N$42
  Bottom 0.254: U13.29 115.09,9.69 116.25,8.53 122.6,8.53 124.19,10.12 124.19,16.47 125.45,17.74 JP12.5
N$43
  Bottom 0.254: U13.30 114.59,9.23 115.93,7.9 122.92,7.9 124.82,9.8 124.82,14.56 125.45,15.2 JP12.6
N$44
  Bottom 0.254: U13.31 114.09,8.78 115.61,7.26 123.23,7.26 125.45,9.48 125.45,11.71 126.41,12.66 JP12.7
N$45
  Bottom 0.254: U13.32 113.59,8.33 115.3,6.63 123.55,6.63 126.09,9.17 126.09,9.8 126.41,10.12 JP12.8
N$46
  Bottom 0.254: U13.33 113.09,7.88 114.98,5.99 123.87,5.99 125.45,7.58 JP12.9
N$47
  Bottom 0.254: U13.34 112.59,7.42 114.66,5.36 124.19,5.36 125.45,6.63 126.72,6.63 JP12.10
N$48
  Bottom 0.254: JP11.1 130.85,29.17 130.22,29.8 127.36,29.8 119.42,21.87 117.52,21.87 117.09,21.44 U13.12
N$49
  Bottom 0.254: JP11.2 132.12,25.36 132.44,25.68 132.44,28.85 130.85,30.44 127.04,30.44 119.11,22.5 117.2,22.5 116.59,21.89 U13.11
N$50
  Bottom 0.254: JP11.3 132.12,22.82 133.07,23.77 133.07,29.17 131.17,31.07 126.72,31.07 118.79,23.14 116.88,23.14 116.09,22.35 U13.10
N$51  (via drill 0.8)
  Top 0.254: v119.42,25.68 119.42,24.73 119.74,24.41 123.23,24.41 v126.09,21.55
  Bottom 0.254: U13.9 115.59,22.8 118.47,25.68 v119.42,25.68 | JP11.4 129.58,21.55 v126.09,21.55
N$52  (via drill 0.8)
  Top 0.254: v120.69,26.95 118.79,26.95 117.83,26 117.83,25.04 119.11,23.77 122.6,23.77 124.82,21.55 124.82,20.28 v126.09,19.01
  Bottom 0.254: JP11.5 129.58,19.01 v126.09,19.01 | U13.8 115.09,23.25 118.79,26.95 v120.69,26.95
N$53  (via drill 0.8)
  Top 0.254: v121.96,28.22 119.11,28.22 117.2,26.31 117.2,24.73 118.79,23.14 122.28,23.14 124.19,21.23 124.19,17.42 125.14,16.47 v126.09,16.47
  Bottom 0.254: JP11.6 129.58,16.47 v126.09,16.47 | U13.7 114.59,23.7 119.11,28.22 v121.96,28.22
N$54  (via drill 0.8)
  Top 0.254: v116.25,27.27 116.25,24.73 118.47,22.5 121.96,22.5 123.55,20.91 123.55,15.2 124.82,13.93 v126.09,13.93
  Bottom 0.254: JP11.7 129.58,13.93 v126.09,13.93 | U13.6 114.09,25.11 v116.25,27.27
N$55  (via drill 0.8)
  Top 0.254: v112.75,24.73 113.39,24.73 117.52,20.6 121.01,20.6 121.64,19.96 121.64,5.04 v122.6,4.09
  Bottom 0.254: JP11.8 132.12,10.12 133.07,9.17 133.07,4.09 131.17,2.18 124.5,2.18 v122.6,4.09 | U13.5 113.59,23.89 v112.75,24.73
N$56  (via drill 0.8)
  Top 0.254: v112.44,26.63 113.39,26.63 114.34,25.68 114.34,24.73 117.83,21.23 121.33,21.23 122.28,20.28 122.28,6.31 v124.5,4.09
  Bottom 0.254: JP11.9 132.12,7.58 132.44,7.26 132.44,4.41 130.85,2.82 125.77,2.82 v124.5,4.09 | U13.4 113.09,22.8 111.48,24.41 111.48,25.68 v112.44,26.63
N$57  (via drill 0.8)
  Top 0.254: v114.34,27.58 115.3,26.63 115.3,24.73 118.15,21.87 121.64,21.87 122.92,20.6 122.92,8.21 v126.09,5.04
  Bottom 0.254: JP11.10 130.85,4.09 130.22,3.45 127.04,3.45 126.09,4.41 v126.09,5.04 | U13.3 112.59,22.35 110.85,24.09 110.85,26.95 111.8,27.9 114.03,27.9 v114.34,27.58
N$58
  Bottom 0.254: JP5.1 130.85,69.81 130.22,70.44 127.36,70.44 119.42,62.51 117.52,62.51 117.09,62.08 U14.12
N$59
  Bottom 0.254: JP5.2 132.12,66 132.44,66.32 132.44,69.49 130.85,71.08 127.04,71.08 119.11,63.14 117.2,63.14 116.59,62.53 U14.11
N$60
  Bottom 0.254: U14.10 116.09,62.99 116.88,63.78 118.79,63.78 126.72,71.72 131.17,71.72 133.07,69.81 133.07,64.41 132.12,63.46 JP5.3
N$61  (via drill 0.8)
  Top 0.254: v119.42,66.32 119.42,65.37 119.74,65.05 123.23,65.05 v126.09,62.19
  Bottom 0.254: JP5.4 129.58,62.19 v126.09,62.19 | v119.42,66.32 118.47,66.32 115.59,63.44 U14.9
N$62  (via drill 0.8)
  Top 0.254: v120.69,67.59 118.79,67.59 117.83,66.64 117.83,65.68 119.11,64.41 122.6,64.41 124.82,62.19 124.82,60.92 v126.09,59.65
  Bottom 0.254: JP5.5 129.58,59.65 v126.09,59.65 | v120.69,67.59 118.79,67.59 115.09,63.89 U14.8
N$63  (via drill 0.8)
  Top 0.254: v121.96,68.86 119.11,68.86 117.2,66.95 117.2,65.37 118.79,63.78 122.28,63.78 124.19,61.87 124.19,58.06 125.14,57.11 v126.09,57.11
  Bottom 0.254: JP5.6 129.58,57.11 v126.09,57.11 | v121.96,68.86 119.11,68.86 114.59,64.34 U14.7
N$64  (via drill 0.8)
  Top 0.254: v116.25,67.91 116.25,65.37 118.47,63.14 121.96,63.14 123.55,61.55 123.55,55.84 124.82,54.57 v126.09,54.57
  Bottom 0.254: JP5.7 129.58,54.57 v126.09,54.57 | v116.25,67.91 114.09,65.75 U14.6
N$65  (via drill 0.8)
  Top 0.254: v112.75,65.37 113.39,65.37 117.52,61.24 121.01,61.24 121.64,60.6 121.64,45.68 v122.6,44.73
  Bottom 0.254: JP5.8 132.12,50.76 133.07,49.81 133.07,44.41 131.17,42.51 124.82,42.51 v122.6,44.73 | U14.5 113.59,64.53 v112.75,65.37
N$66  (via drill 0.8)
  Top 0.254: v112.44,67.27 113.39,67.27 114.34,66.32 114.34,65.37 117.83,61.87 121.33,61.87 122.28,60.92 122.28,46.95 v124.5,44.73
  Bottom 0.254: JP5.9 132.12,48.22 132.44,47.9 132.44,44.73 130.85,43.14 126.09,43.14 v124.5,44.73 | U14.4 113.09,63.44 111.48,65.05 111.48,66.32 v112.44,67.27
N$67  (via drill 0.8)
  Top 0.254: v114.34,68.22 115.3,67.27 115.3,65.37 118.15,62.51 121.64,62.51 122.92,61.24 122.92,48.85 v126.09,45.68
  Bottom 0.254: JP5.10 130.85,44.41 130.22,43.77 127.36,43.77 126.09,45.05 v126.09,45.68 | U14.3 112.59,62.99 110.85,64.73 110.85,67.59 111.8,68.54 114.03,68.54 v114.34,68.22
N$68
  Bottom 0.254: U14.25 117.09,52.14 117.52,51.71 121.33,51.71 121.64,52.03 121.64,63.78 126.41,68.54 JP6.1
N$69
  Bottom 0.254: U14.26 116.59,51.69 117.2,51.08 121.64,51.08 122.28,51.71 122.28,62.83 125.45,66 JP6.2
N$70
  Bottom 0.254: U14.27 116.09,51.23 116.88,50.44 121.96,50.44 122.92,51.4 122.92,60.92 125.45,63.46 JP6.3
N$71
  Bottom 0.254: U14.28 115.59,50.78 116.56,49.81 122.28,49.81 123.55,51.08 123.55,59.02 125.45,60.92 JP6.4
N$72
  Bottom 0.254: U14.29 115.09,50.33 116.25,49.17 122.6,49.17 124.19,50.76 124.19,57.11 125.45,58.38 JP6.5
N$73
  Bottom 0.254: U14.30 114.59,49.88 115.93,48.54 122.92,48.54 124.82,50.44 124.82,55.2 125.45,55.84 JP6.6
N$74
  Bottom 0.254: U14.31 114.09,49.42 115.61,47.9 123.23,47.9 125.45,50.12 125.45,52.35 126.41,53.3 JP6.7
N$75
  Bottom 0.254: U14.32 113.59,48.97 115.3,47.27 123.55,47.27 126.09,49.81 126.09,50.44 126.41,50.76 JP6.8
N$76
  Bottom 0.254: U14.33 113.09,48.52 114.98,46.63 123.87,46.63 125.45,48.22 JP6.9
N$77
  Bottom 0.254: U14.34 112.59,48.06 114.66,46 124.19,46 125.45,47.27 126.72,47.27 JP6.10
N$78  (via drill 0.8)
  Top 0.254: v107.36,62.83 108.63,62.83 117.2,54.25 117.2,46 v118.47,44.73
  Bottom 0.254: U14.2 112.09,62.53 111.8,62.83 v107.36,62.83 | JP13.1 117.2,43.46 v118.47,44.73
N$79  (via drill 0.8)
  Top 0.254: v108.31,61.24 109.26,61.24 112.44,58.06 v112.44,45.68
  Bottom 0.254: 111.59,61.55 U14.1 111.59,61.24 v108.31,61.24 | v112.44,45.68 113.71,44.41 JP13.2
N$80
  Bottom 0.254: JP13.3 111.17,44.41 110.53,45.05 110.53,46.31 110.85,46.63 110.85,53.62 111.8,54.57 111.8,59.33 111.28,59.86 U14.48
N$81  (via drill 0.8)
  Top 0.254: v107.04,59.97 108.63,58.38 v108.63,45.68
  Bottom 0.254: U14.47 107.65,59.36 v107.04,59.97 | v108.63,45.68 JP13.4
N$82  (via drill 0.8)
  Top 0.254: v106.25,58.22 106.09,58.06 v106.09,45.68
  Bottom 0.254: JP13.5 v106.09,45.68 | U14.46 106.89,58.86 v106.25,58.22
N$83  (via drill 0.8)
  Top 0.254: v103.55,45.68 104.66,46.79 v104.66,57.27
  Bottom 0.254: v103.55,45.68 JP13.6 | U14.45 107.97,58.36 106.41,56.79 105.14,56.79 v104.66,57.27
N$84
  Bottom 0.254: U14.35 112.09,47.61 114.98,44.73 114.98,42.19 JP14.1
N$85
  Bottom 0.254: U14.36 111.59,46.52 111.17,46.1 111.17,45.36 112.44,44.09 112.44,42.19 JP14.2
N$86
  Bottom 0.254: JP14.3 109.9,42.19 109.9,46.63 110.09,46.83 U14.37
N$87
  Bottom 0.254: U14.38 109.08,54.86 107.36,53.14 107.36,42.19 JP14.4
N$88
  Bottom 0.254: U14.39 108.62,55.36 106.72,53.46 106.72,48.22 104.82,46.31 104.82,42.19 JP14.5
N$89
  Bottom 0.254: U14.40 108.17,55.86 106.09,53.78 106.09,50.44 102.28,46.63 102.28,42.19 JP14.6
N$90
  Bottom 0.254: U13.2 112.09,21.89 110.22,23.77 110.22,27.27 111.8,28.85 115.3,28.85 116.25,29.8 JP15.1
N$91
  Bottom 0.254: JP15.2 113.71,29.8 113.39,29.49 111.48,29.49 109.58,27.58 109.58,23.45 111.59,21.44 U13.1
N$92
  Bottom 0.254: JP15.3 111.17,30.12 108.94,27.9 108.94,19.64 109.37,19.22 U13.48
N$93
  Bottom 0.254: JP15.4 108.63,28.54 108.31,28.22 108.31,19.33 108.92,18.72 U13.47
N$94
  Bottom 0.254: U13.46 108.47,18.22 107.67,19.01 107.67,22.18 105.77,24.09 105.77,25.04 106.09,25.36 JP15.5
N$95
  Bottom 0.254: U13.45 108.01,17.72 107.04,18.69 107.04,21.87 103.55,25.36 JP15.6
N$96
  Bottom 0.254: U13.35 112.09,11.36 111.8,11.07 111.17,11.07 110.53,11.71 104.82,11.71 101.33,15.2 101.33,22.82 99.74,24.41 99.74,36.16 100.69,37.11 102.59,37.11 103.87,35.84 113.71,35.84 JP16.1
N$97
  Bottom 0.254: JP16.2 111.8,35.2 103.55,35.2 102.28,36.47 101.01,36.47 100.37,35.84 100.37,24.73 101.96,23.14 101.96,15.52 105.26,12.22 U13.36
N$98
  Bottom 0.254: JP16.3 109.9,34.57 102.59,34.57 101.64,33.61 101.64,25.36 103.23,23.77 103.23,16.15 105.66,13.72 U13.37
N$99  (via drill 0.8)
  Top 0.254: v107.04,24.41 107.04,21.23 v104.5,18.69
  Bottom 0.254: JP16.4 107.36,32.03 107.36,28.85 107.04,28.54 v107.04,24.41 | v104.5,18.69 105.14,18.06 105.14,15.2 106.11,14.22 U13.38
N$100  (via drill 0.8)
  Top 0.254: v104.82,26 v104.82,21.23
  Bottom 0.254: JP16.5 104.82,32.03 v104.82,26 | U13.39 106.57,14.72 105.77,15.52 105.77,20.28 v104.82,21.23
N$101
  Bottom 0.254: JP16.6 102.28,32.03 102.28,25.68 106.41,21.55 106.41,15.84 107.02,15.22 U13.40
N$102
  Top 0.254: U2.9 94.79,58.2 93.92,57.33 RA2.2
N$103
  Top 0.254: U2.2 94.79,55.18 93.76,54.15 RA1.2
N$104
  Top 0.356: U5.25 90.48,29.75 88.94,28.22 RFB7.1
N$105
  Top 0.356: U5.26 90.78,29.1 88.62,26.95 RFB8.1
N$106  (via drill 0.8)
  Top 0.356: TP14.TP 45.45,79.65 v35.92,70.13
  Bottom 0.254: U6.25 34.67,76.45 35.28,75.84 35.28,74.89 35.92,74.25 v35.92,70.13
N$107
  Top 0.356: U15.5 87.35,49.84 C25.1
N$108
  Top 0.356: U15.4 85.55,50.34 R20.1
PA0  (via drill 0.8)
  Top 0.356: v19.09,53.3 19.09,66.32 21.32,68.54 36.24,68.54 45.76,78.06 81.32,78.06 81.93,77.46 S1.1
  Top 0.914: S1.2 S1.1
  Bottom 0.356: JP1.12 v19.09,53.3
PA2  (via drill 0.8)
  Top 0.356: v14.33,72.35 12.43,70.44 12.43,69.17 | v12.43,49.49 12.43,69.17 | R5.1 12.43,69.17
  Bottom 0.254: U6.30 30.45,74.19 29.57,73.3 21.95,73.3 21,72.35 v14.33,72.35
  Bottom 0.356: v12.43,49.49 15.6,49.49 JP1.14
PA7
  Bottom 0.254: U6.40 25.11,79.36 23.54,80.92 RS2.1 22.8,81.66 22.27,82.19 12.11,82.19 11.16,81.24 11.16,46.31 11.79,45.68 JP1.17
PA9
  Bottom 0.914: JP10.1 72.11,12.66 | 72.11,12.66 JP2.44 | R22.2 72.11,12.66
PB4  (via drill 0.8)
  Top 0.356: U5.16 93.62,35.6 94.66,34.57 94.66,24.73 93.7,23.77 80.37,23.77 76.88,27.27 72.43,27.27 71.16,28.54 71.16,33.93 v69.89,35.2
  Bottom 0.356: JP2.25 66.4,36.79 68.31,36.79 v69.89,35.2
PB5  (via drill 0.8)
  Top 0.356: U5.15 93.92,36.25 95.29,34.88 95.29,24.41 94.02,23.14 80.05,23.14 76.56,26.63 72.11,26.63 70.53,28.22 70.53,32.66 v69.89,33.3
  Bottom 0.356: JP2.26 v69.89,33.3
PB6  (via drill 0.8)
  Top 0.254: v82.28,57.11 79.42,54.25 79.42,51.71 79.68,51.45 U1.16 79.68,48.17 79.42,47.9 72.11,47.9 v69.89,45.68
  Top 0.356: v60.37,36.79 59.41,35.84 56.24,35.84 55.61,36.47 U4.6 R12.1
  Bottom 0.356: JP7.3 125.77,73.62 125.14,72.98 97.2,72.98 82.28,58.06 v82.28,57.11 | v69.89,45.68 68.62,44.41 64.5,44.41 63.86,43.77 63.86,39.33 JP2.23 61.64,38.06 v60.37,36.79
PB7  (via drill 0.8)
  Top 0.356: U5.17 93.32,34.95 94.02,34.25 94.02,25.04 93.39,24.41 80.69,24.41 77.19,27.9 72.75,27.9 71.8,28.85 71.8,35.2 v69.89,37.11
  Bottom 0.356: JP2.24 68.94,38.06 v69.89,37.11
PB8  (via drill 0.8)
  Top 0.254: v69.89,39.01 74.34,43.46 83.55,43.46 84.23,42.77 U1.8
  Bottom 0.356: JP2.19 66.4,41.87 66.4,39.97 67.03,39.33 68.62,39.33 68.94,39.01 v69.89,39.01
PB9  (via drill 0.8)
  Top 0.254: v69.89,43.77 73.38,47.27 80.05,47.27 80.33,47.55 U1.15 80.33,51.75 80.05,52.03 80.05,53.94 81.32,55.2 v82.28,55.2
  Top 0.356: v69.89,43.77 69.89,42.82 68.94,41.87 v62.59,41.87 | v60.05,39.33 59.31,40.07 R21.1 56.88,39.12 U4.5
  Bottom 0.356: JP7.2 128.31,73.62 127.04,72.35 97.52,72.35 83.55,58.38 83.55,56.48 v82.28,55.2 | JP2.20 69.26,43.14 v69.89,43.77 | v62.59,41.87 v60.05,39.33
PB11
  Bottom 0.254: U6.2 27.95,86.03 26.71,87.27 10.52,87.27 9.25,86 9.25,24.09 10.52,22.82 JP1.35
PB12
  Bottom 0.254: U6.3 28.45,86.48 27.03,87.91 10.2,87.91 8.62,86.32 8.62,23.77 10.84,21.55 15.28,21.55 15.6,21.87 15.6,22.5 15.92,22.82 JP1.36
PB13
  Bottom 0.254: U6.4 28.95,86.94 27.35,88.54 9.89,88.54 7.98,86.64 7.98,23.45 11.16,20.28 JP1.37
PC1
  Bottom 0.254: U6.31 29.95,74.64 29.25,73.94 21.63,73.94 20.68,72.98 15.6,72.98 14.96,73.62 13.7,73.62 12.43,72.35 12.43,59.02 13.06,58.38 JP1.7
PC2  (via drill 0.8)
  Top 0.356: v20.36,55.84 21.63,57.11 21.63,66.32 22.59,67.27 36.87,67.27 46.4,76.8 80.69,76.8 82.91,74.57 v85.45,74.57 | v71.48,38.06 74.97,34.57 SJ3.1
  Bottom 0.356: JP1.10 v20.36,55.84 | v85.45,74.57 85.13,74.57 82.59,72.03 82.59,69.81 72.43,59.65 72.43,39.01 v71.48,38.06
PC4
  Bottom 0.254: U6.43 24.56,80.86 22.59,82.83 11.79,82.83 10.52,81.56 10.52,46 12.11,44.41 15.6,44.41 JP1.20
PC5
  Bottom 0.254: U6.44 25.01,81.36 22.9,83.46 11.47,83.46 9.89,81.88 9.89,45.68 12.43,43.14 JP1.19
PC9
  Bottom 0.356: JP2.46 66.4,8.85 63.86,8.85 62.91,7.9 62.91,5.36 61.95,4.41 23.22,4.41 21.95,5.67 21.95,17.11 19.73,19.33 SJ2.2
PC10  (via drill 0.8)
  Top 0.356: v118.47,12.34 103.23,12.34 101.33,14.25 101.33,20.6 100.69,21.23 79.1,21.23 76.24,24.09 v73.07,24.09 | v118.47,52.98 118.47,53.94 107.04,65.37 87.04,65.37 v84.5,67.91 | U8.6 U9.6 49.26,18.69 51.48,16.47 54.65,16.47 56.88,18.69 U11.6 v60.37,18.69
  Bottom 0.254: U13.19 117.58,16.22 117.2,15.84 117.2,13.61 v118.47,12.34 | U14.19 117.58,56.86 117.2,56.48 117.2,54.25 v118.47,52.98
  Bottom 0.356: v84.5,67.91 83.55,67.91 74.34,58.7 74.34,25.36 v73.07,24.09 71.8,22.82 69.58,22.82 68.31,21.55 67.03,21.55 66.4,20.91 66.4,20.6 66.08,20.28 JP2.37 61.95,20.28 v60.37,18.69
PC11  (via drill 0.8)
  Top 0.356: U11.2 v50.84,19.96 | U8.2 U9.2 v38.46,19.96
  Bottom 0.356: JP2.38 66.4,19.01 63.86,19.01 62.27,17.42 51.48,17.42 50.84,18.06 v50.84,19.96 v38.46,19.96
PC12  (via drill 0.8)
  Top 0.356: v120.53,15.84 119.42,15.84 116.88,13.29 103.55,13.29 101.96,14.88 101.96,20.91 101.01,21.87 79.42,21.87 75.92,25.36 72.43,25.36 v71.16,24.09 | v120.53,56.48 116.88,56.48 107.36,66 87.35,66 85.77,67.59 85.77,69.17 v85.13,69.81 | U8.5 U9.5 49.26,17.42 50.84,15.84 54.97,15.84 56.56,17.42 U11.5 61.32,17.42 61.95,18.06 61.95,22.18 v61.32,22.82
  Bottom 0.254: U13.18 119.65,16.72 v120.53,15.84 | U14.18 119.65,57.36 v120.53,56.48
  Bottom 0.356: v85.13,69.81 84.5,69.81 73.7,59.02 73.7,26.63 v71.16,24.09 66.4,24.09 JP2.35 v61.32,22.82
PD0  (via drill 0.8)
  Top 0.356: U8.1 U9.1 40.68,21.25 v40.68,22.82
  Bottom 0.356: JP2.36 66.72,22.82 66.4,22.5 66.4,22.18 65.77,21.55 41.95,21.55 v40.68,22.82
PD1  (via drill 0.8)
  Top 0.356: v53.06,25.36 53.06,21.29 U11.1
  Bottom 0.356: JP2.33 v53.06,25.36
PD2  (via drill 0.8)
  Top 0.356: v120.53,17.58 119.58,17.58 116.25,14.25 103.87,14.25 102.59,15.52 102.59,21.23 101.33,22.5 79.73,22.5 76.24,26 70.53,26 v69.89,25.36 | v120.53,58.22 116.09,58.22 107.67,66.64 87.67,66.64 86.4,67.91 86.4,70.29 85.45,71.24 v83.86,71.24
  Bottom 0.254: U13.17 120.17,17.22 v120.53,17.58 | U14.17 120.17,57.86 v120.53,58.22
  Bottom 0.356: v83.86,71.24 83.86,70.13 73.07,59.33 73.07,28.54 v69.89,25.36 JP2.34
PD8  (via drill 0.8)
  Top 0.356: U7.3 80.57,18.57 79.42,17.42 79.42,3.77 77.99,2.34 22.43,2.34 20.68,4.09 v20.68,16.47
  Bottom 0.356: v20.68,16.47 19.09,18.06 19.09,20.28 17.82,21.55 16.23,21.55 15.6,20.91 15.6,19.01 JP1.40
PD9  (via drill 0.8)
  Top 0.356: U7.4 81.76,16.27 v81.64,16.15
  Bottom 0.356: JP1.41 15.6,13.93 17.82,13.93 18.77,12.98 18.77,5.99 22.27,2.5 87.04,2.5 88.94,4.41 88.94,13.93 90.21,15.2 90.21,16.47 89.58,17.11 82.59,17.11 v81.64,16.15
PE2  (via drill 0.8)
  Top 0.356: v89.9,90.77 87.17,93.49 J3.3
  Bottom 0.356: JP2.15 63.86,49.49 63.86,59.02 64.5,59.65 69.89,59.65 78.15,67.91 78.15,69.17 89.9,80.92 v89.9,90.77
PE4  (via drill 0.8)
  Top 0.356: v69.89,48.85 72.11,48.85 81.64,58.38 87.67,58.38 88.31,57.74 88.31,56.63 87.67,56 87.67,54.89 88.31,54.26 U15.1
  Bottom 0.356: JP2.13 66.4,49.49 68.31,49.49 68.94,48.85 v69.89,48.85
PE5  (via drill 0.8)
  Top 0.254: v93.07,55.84 93.18,55.95 U2.1
  Top 0.356: v93.07,59.02 81.32,59.02 73.07,50.76 v69.89,50.76
  Bottom 0.356: v93.07,55.84 v93.07,59.02 | JP2.14 v69.89,50.76
PE6  (via drill 0.8)
  Top 0.254: 94.18,60.28 U2.10
  Top 0.356: 94.18,60.28 92.44,60.28 91.8,59.65 81,59.65 74.02,52.66 v69.89,52.66
  Bottom 0.356: JP2.11 66.4,52.03 69.26,52.03 v69.89,52.66
RD_N  (via drill 0.8)
  Top 0.254: v41,90.77 45.49,90.77 51.9,84.35 79.52,84.35 82.06,81.81 107.57,81.81 114.56,88.8 115.61,88.8 116.25,89.43 v116.25,89.5
  Bottom 0.254: U6.13 35.18,83.36 35.28,83.46 35.28,88.22 36.87,89.81 R4.1 37.61,90.55 37.83,90.77 v41,90.77 | J2.6 v116.25,89.5
RD_P  (via drill 0.8)
  Top 0.254: v116.25,87.59 116.25,87.65 115.61,88.29 114.77,88.29 107.78,81.3 81.85,81.3 79.31,83.84 51.69,83.84 47.88,87.65 46.46,87.65 v45.45,86.64
  Bottom 0.254: U6.14 35.63,82.86 35.92,83.14 35.92,87.11 36.55,87.75 R3.1 37.61,87.17 38.14,86.64 v45.45,86.64 | J2.4 116.88,86.95 v116.25,87.59
RFB
  Top 0.254: U1.4 81.63,39.22 R19.1
TD_N  (via drill 0.8)
  Top 0.254: v116.25,85.37 116.25,85.3 115.61,84.67 112.97,84.67 108.84,80.54 81.43,80.54 78.89,83.08 45.51,83.08 44.17,84.42 v44.17,85.37
  Bottom 0.254: U6.16 35.58,81.86 36.55,82.83 36.55,84.73 36.87,85.05 R2.1 37.61,85.63 37.98,86 43.54,86 v44.17,85.37 | J2.3 116.56,85.69 v116.25,85.37
TD_P  (via drill 0.8)
  Top 0.254: v42.43,81.4 43.63,81.4 44.81,82.57 78.68,82.57 81.22,80.03 109.05,80.03 113.18,84.16 115.61,84.16 116.25,83.53 v116.25,83.46
  Bottom 0.254: U6.17 35.98,81.36 R1.1 37.61,82.41 38.14,81.88 41.95,81.88 v42.43,81.4 | J2.1 116.56,83.14 v116.25,83.46
USB_N  (via drill 0.8)
  Top 0.356: J1.2 87.62,15.25 v87.04,15.84
  Bottom 0.254: v87.04,15.84 87.1,15.84 87.74,15.2 87.74,4.83 86.62,3.71 22.69,3.71 19.98,6.42 19.98,15.3 18.46,16.83 18.46,18.69 JP1.38
USB_P  (via drill 0.8)
  Top 0.356: J1.3 89.62,15.15 v88.94,15.84
  Bottom 0.254: v88.94,15.84 88.88,15.84 88.24,15.2 88.24,4.62 86.83,3.2 22.48,3.2 19.47,6.21 19.47,15.1 18.1,16.47 15.6,16.47 JP1.39
VCC  (via drill 0.8)
  Top 0.254: U2.6 96.77,60.18 v97.52,60.92 | U1.11 U1.10 U1.9 | U2.5 96.29,55.68 v97.52,55.68
  Top 0.356: U5.1 99.96,27.8 100.85,28.69 | U8.7 U9.7 | U8.8 U9.8 | U5.18 91.43,34.3 91.16,34.57 91.16,37.21 C5.1 | U8.3 U9.3 39.1,18.7 38.78,18.38 | U15.2 87.35,53.94 85.61,55.68
  Top 0.914: 40.05,84.73 v41.32,84.73 41.32,88.54 v41.95,89.18 | v120.38,19.33 115.3,19.33 106.72,27.9 101.64,27.9 100.85,28.69 100.06,29.49 100.06,37.42 97.83,39.65 97.52,39.65 | C5.1 92.49,39.65 | 92.49,39.65 C6.1 92.49,41.92 R16.2 89.47,42.61 86.09,46 84.81,46 83.58,47.23 U1.10 83.58,51.08 | 97.52,39.65 92.49,39.65 | U3.8 97.52,39.65 | C4.1 83.58,51.08 | 83.58,51.08 83.58,53.66 85.61,55.68 v87.04,57.11
  Bottom 0.254: U6.22 35.61,78.86 37.35,77.11 C8.1 38.56,78.06 40.21,78.06 41.16,77.11 41.16,75.84 41.48,75.53 43.76,75.53 | U6.48 26.05,84.65 C9.1 | U6.32 29.45,75.09 28.94,74.57 20.68,74.57 v20.2,74.1
  Bottom 0.356: J2.AG 134.98,90.03 134.98,86.64 | 134.98,86.64 134.98,80.29 | 134.98,80.29 v134.98,77.43 | J2.AY 134.31,80.96 134.98,80.29 | 124.19,84.42 124.19,81.88 123.23,80.92 C11.1 | J2.2 124.19,84.42 | J2.5 124.19,88.22 | 124.19,88.22 C12.1 | 124.19,84.42 124.19,86.64 | 124.19,86.64 134.98,86.64 | 124.19,86.64 124.19,88.22
  Bottom 0.914: v97.52,55.68 v97.52,60.92 97.52,62.83 96.88,63.46 93.39,63.46 v87.04,57.11 | C13.2 R3.2 39.31,89.08 39.41,89.18 | C14.1 R1.2 R2.2 39.31,84.73 v41.32,84.73 | R8.2 R7.2 43.76,75.53 43.76,74.67 v45.13,73.3 | R4.2 39.31,89.18 39.41,89.18 | 39.41,89.18 v41.95,89.18 | v74.66,75.53 JP4.1 | RS3.1 33.06,71.18 | 33.06,71.18 v33.06,69.81 | RS4.1 33.06,71.18 | RS1.1 18.14,79.44 v18.14,78.06 | v24.17,70.13 24.59,70.55 C10.1 R11.2 | v26.24,86.16 25.98,85.9 C9.1 | v105.77,75.53 v105.77,83.14
  other vias: 120.38,59.97
  pour Bottom (no thermals): 117.83,60.28 121.01,60.28 121.01,59.33 117.83,59.33
  pour Bottom (no thermals): 117.83,19.64 121.01,19.64 121.01,18.69 117.83,18.69
  pour Top (rank 6): -0.1,-0.67 140.06,-0.67 140.06,100.29 -0.1,100.29
VCC/2
  Top 0.356: 94.34,44.73 94.98,45.37 U3.3 94.98,49.48 TP9.TP | 94.34,44.73 93.7,44.09 U3.5 | 91.8,45.05 C26.2 R17.2 88.31,45.78 R20.2 | R16.1 91.8,45.05 | 91.8,45.05 94.02,45.05 94.34,44.73
VDD  (via drill 0.8)
  Top 0.914: v94.97,73.94 94,72.96 S1.3 S1.4 82.25,72.96 81.32,72.03 v81.32,70.44
  Bottom 0.914: JP2.22 69.26,40.6 71.48,42.82 71.48,59.97 79.42,67.91 JP3.2 v81.32,70.44 | v94.97,73.94 122.28,73.94 JP7.4
VIN
  Top 0.254: U1.5 82.28,39.85 R19.2
  Top 0.356: R19.2 84.71,39.01 R18.1
VOUT  (via drill 0.8)
  Top 0.254: 86.09,42.19 86.09,41.55 84.81,40.28 83.23,40.28 82.93,40.58 U1.6 | 86.09,42.19 v86.09,43.77 | TP3.TP 86.09,42.19
  Top 0.356: C25.2 v92.12,49.49
  Bottom 0.356: v86.09,43.77 89.58,43.77 92.12,46.31 v92.12,49.49

## Text on the board
Top: TOP | mini Impedance Spectrometer / Peter Feichtinger 2014 | REV 1.0
Bottom: BOTTOM
tDocu: 5V | PHY JTAG | Icc | I2C | User | Reset | Idd | Force | HI | Sense | Sense | Force | GND | Sense | LO | Force | VBUS | mini Impedance Spectrometer / Peter Feichtinger 2014 | REV 1.0